# EAGLE board mag_encoder_Rev3_single_sided_4-up (EAGLE 7.5.0)
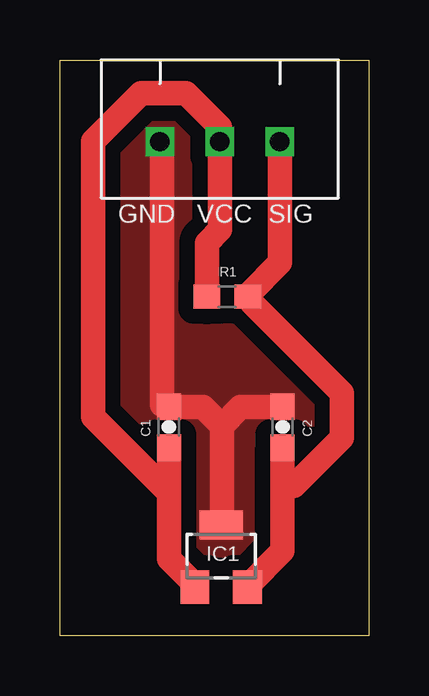
[diagram p0: board, top side]

Size 12.88 x 24 mm. Coordinates in mm from the lower left corner, seen from the top.
Outline: 0,0 0,24 12.88,24 12.88,0 0,0
Copper layers 1: Top 0.0356mm
Design rules "LawlorPCB": minimum track width 25mil, minimum drill 13mil, track to track 25mil, track to pad 25mil, pad to pad 10mil, via to via 10mil, smd to smd 10mil, copper to edge 15mil, drill to drill 15mil, minimum pad ring 7mil, minimum via ring 7mil, stop-mask expansion 3mil, vias tented up to drill 0mil, thermal gap 10mil

## Footprints (pad centres in the part's own frame; a part is rotated, then mirrored left to right if it is on the bottom)
0603-CAP = smd 1.1 x 1: 1 -0.85,0; 2 0.85,0
SOT23-W = smd 1.2 x 1.4: 1 -1.1,-1.3; 2 1.1,-1.3 | smd 1.8 x 1.2: 3 0,1.3
0603 = smd 1.1 x 1: 1 -0.85,0; 2 0.85,0
3_PIN_JST-XH = drill 0.8 square: P$1 2.45,3.4; P$2 4.95,3.4; P$3 7.45,3.4

## Placement (x,y rotation side)
C1  100nF  [0603-CAP]  4.54,8.69 90 top
C2  4.7nF  [0603-CAP]  9.29,8.69 90 top
IC1  A1203LH  [SOT23-W]  6.73,3.32 0 top
R1  10k  [0603]  6.98,14.13 180 top
U$1  3_PIN_JST-XH  [3_PIN_JST-XH]  11.62,24 180 top

## Library data of the parts
C1 = SparkFun-Capacitors
C2 = SparkFun-Capacitors; PROD_ID: CAP-11378
IC1 = allegro; MF: ALLEGRO MICROSYSTEMS, INC.; MPN: A1203LLHLT-T; OC_FARNELL: 1791384; OC_NEWARK: 31K6608
R1 = SparkFun-Resistors; PROD_ID: RES-09570
U$1 = Clayton

## Nets
GND: C1.2 C2.2 IC1.3 U$1.P$3
SIG: C2.1 IC1.2 R1.1 U$1.P$1
VCC: C1.1 IC1.1 R1.2 U$1.P$2

## Tracks (layer width: path | path; a pad name or v marks a point on that pad's centre or on a via)
GND
  Top 0.635: 4.62,9.62 C1.2 4.25,9.62 | 9.25,9.62 C2.2 | 6.75,4.62 IC1.3 | 4.25,20.5 U$1.P$3
  Top 1.016: 6.75,4.62 6.75,8.75 | 6.75,8.75 7.54,9.54 C2.2 | 6.75,8.75 5.96,9.54 C1.2 | 4.25,9.62 4.25,20.52 U$1.P$3
  pour Top (no thermals): -1,24.5 13.5,24.5 13.5,-1.25 -0.88,-1.25
SIG
  Top 0.635: 9.25,7.75 C2.1 | 7.88,2.12 IC1.2 | 7.88,14.25 R1.1 8,13.88 | 9.12,20.5 U$1.P$1
  Top 1.016: 7.88,2.12 9.29,3.54 9.29,6.25 | 9.29,6.25 C2.1 | 7.88,14.25 9.17,15.54 U$1.P$1 | 8,13.88 11.75,10.12 11.75,8.25 9.75,6.25 9.29,6.25
VCC
  Top 0.635: 4.62,7.75 C1.1 | 5.62,2.12 IC1.1 | 6.62,20.88 U$1.P$2
  Top 1.016: 5.62,2.12 4.54,3.21 4.54,5.96 | 4.54,5.96 C1.1 | 4.54,5.96 1.38,9.12 1.38,20.62 3.38,22.62 5.25,22.62 6.67,21.21 U$1.P$2 6.67,16.92 6.12,16.38 R1.2

## Text on the board
tNames: GND | VCC | SIG
bNames: Magnetic Encoder Rev3